# EAGLE board EATremelo1590A (EAGLE 6.6.0)
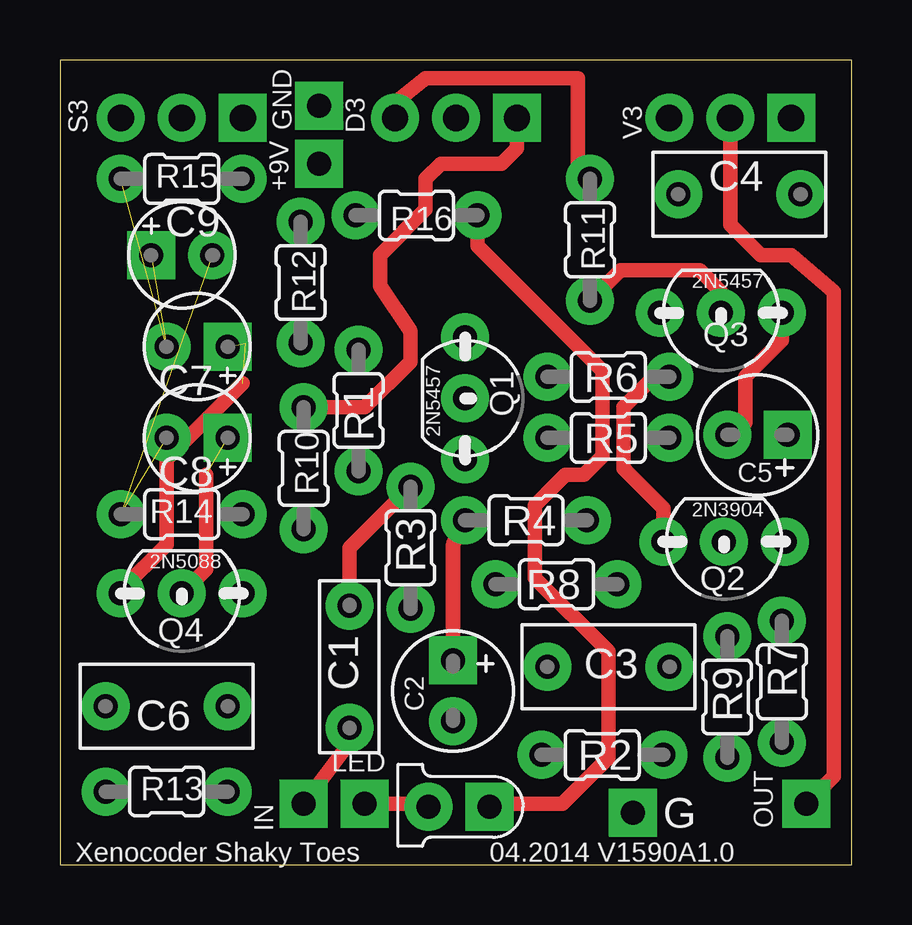
[diagram p0: board, top side]
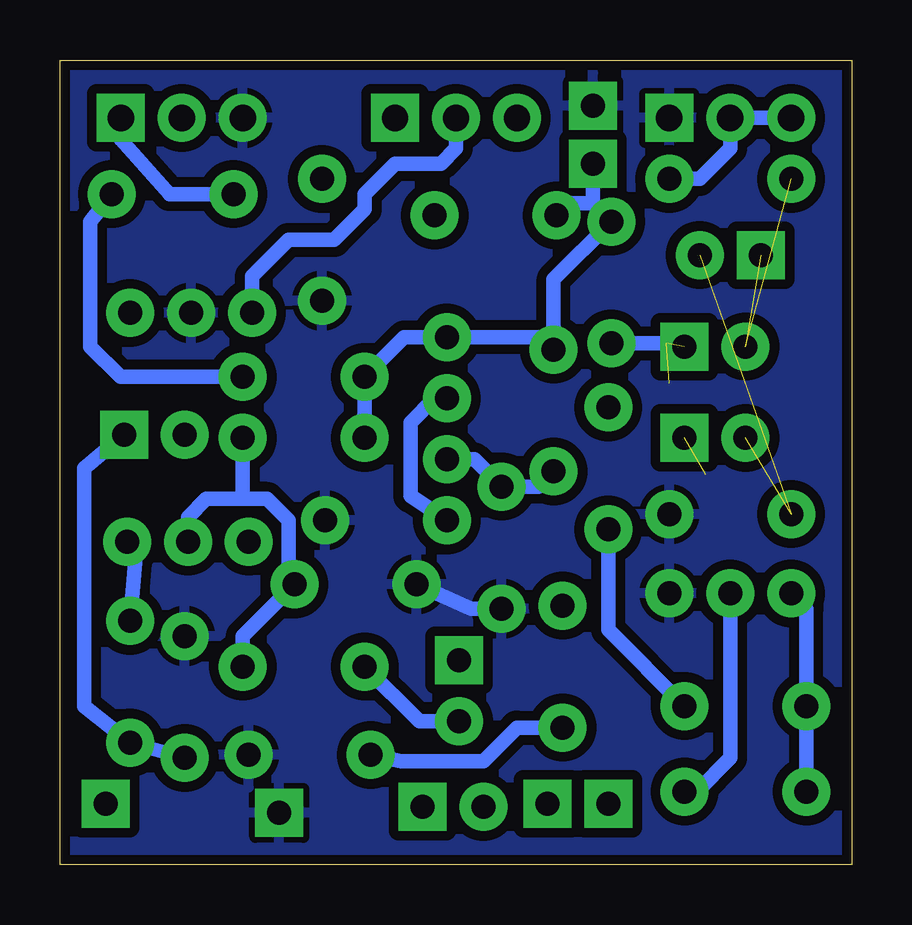
[diagram p1: board, bottom side, seen from below]

Size 33.02 x 33.53 mm. Coordinates in mm from the lower left corner, seen from the top.
Outline: 0,0 33.02,0 33.02,33.53 0,33.53 0,0
Copper layers (1*16): Top 0.0356mm / dielectric 1.5011mm / Bottom 0.0356mm
Design rules "LaenPCBOrder": minimum track width 6mil, minimum drill 13mil, track to track 6mil, track to pad 6mil, pad to pad 6mil, via to via 6mil, smd to smd 6mil, copper to edge 15mil, drill to drill 6mil, minimum pad ring 7mil, minimum via ring 7mil, stop-mask expansion 3mil, vias tented up to drill 0mil, thermal gap 10mil

## Footprints (pad centres in the part's own frame; a part is rotated, then mirrored left to right if it is on the bottom)
SQUARE = drill 1 pad 2 square: 1 0,0
072X025 = drill 1 pad 2: 1 -2.54,0; 2 2.54,0
050_020_1 = drill 1 pad 2 square: + -1.27,0 | drill 1 pad 2: - 1.27,0
072X035 = drill 1 pad 2: 1 -2.54,0; 2 2.54,0
044A = drill 1 pad 2 square: 1 -1.27,0 | drill 1 pad 2: 2 1.27,0
LED3MM = drill 1 pad 2 square: A -1.27,0 | drill 1 pad 2: K 1.27,0
TO92- = drill 1 pad 2: 1 2.54,0; 2 0,0; 3 -2.54,0
R0204/2 = drill 1 pad 2: 1 -2.54,0; 2 2.54,0
POT_9MM_HOLES = drill 1.1 pad 2: P$1 2.54,0; P$2 0,0 | drill 1.1 pad 2 square: P$3 -2.54,0

## Placement (x,y rotation side)
+9V  +9V(T)  [SQUARE]  10.79,29.21 0 top
C1  0.047uF  [072X025]  12.06,8.26 90 top
C2  10uF  [050_020_1]  16.38,7.24 270 top
C3  0.22uF  [072X035]  22.86,8.26 0 top
C4  0.47uF  [072X035]  28.32,27.94 180 top
C5  22uF  [050_020_1]  29.08,17.91 180 top
C6  0.47uF  [072X035]  4.45,6.6 180 top
C7  1uF  [044A]  5.71,21.59 180 top
C8  1uF  [044A]  5.71,17.78 180 top
C9  1uF  [044A]  5.08,25.4 0 top
D1  LED3MM  [LED3MM]  16.64,2.41 180 top
G  GND(T)  [SQUARE]  23.88,2.16 0 top
GND  GND(T)  [SQUARE]  10.79,31.62 0 top
IN  IN(T)  [SQUARE]  10.16,2.54 0 top
LED  3mm  [SQUARE]  12.7,2.54 0 top
OUT  OUT(T)  [SQUARE]  31.11,2.54 0 top
Q1  2N5457  [TO92-]  16.89,19.43 270 top
Q2  2N3904  [TO92-]  27.69,13.46 180 top
Q3  2N5457  [TO92-]  27.56,22.99 180 top
Q4  2N5088  [TO92-]  5.08,11.3 180 top
R1  1M  [R0204/2]  12.45,18.92 90 top
R2  1M  [R0204/2]  22.61,4.57 180 top
R3  1M  [R0204/2]  14.61,13.21 90 top
R4  10k  [R0204/2]  19.43,14.35 180 top
R5  560K  [R0204/2]  22.86,17.78 180 top
R6  4k7  [R0204/2]  22.86,20.32 180 top
R7  180  [R0204/2]  30.1,7.62 90 top
R8  150k  [R0204/2]  20.7,11.68 0 top
R9  1k2  [R0204/2]  27.81,6.99 270 top
R10  120k  [R0204/2]  10.16,16.51 270 top
R11  68k  [R0204/2]  22.1,26.04 90 top
R12  15k  [R0204/2]  10.03,24.26 90 top
R13  2M2  [R0204/2]  4.45,3.05 180 top
R14  15k  [R0204/2]  5.08,14.61 180 top
R15  1k  [R0204/2]  5.08,28.57 180 top
R16  4k7  [R0204/2]  14.86,27.05 180 top
SPEED  C100K  [POT_9MM_HOLES]  5.08,31.11 180 top
VALUE  DEPTH  [POT_9MM_HOLES]  16.51,31.11 180 top
VOLUME  A25K  [POT_9MM_HOLES]  27.94,31.11 180 top

## Library data of the parts
+9V G GND IN LED OUT = mb_supply
C1 C3 C4 C6 = mb_caps-box
C2 C5 = mb_caps-electro
C7-C9 = mb_caps-tant
D1 = mb_diodes
Q1-Q4 = mb_trans
R1-R16 = mb_resistors
SPEED VALUE VOLUME = mb_9mm Pot

## Nets
+9V: +9V.1 Q1.3 R1.2 R5.2 R6.2 R12.2 R16.2
GND: G.1 GND.1 Q3.2 Q4.3 R2.1 R3.1 R4.1 R8.1 R9.1 R11.1 R14.1 SPEED.P$3 VOLUME.P$1
IN: C1.1 IN.1 R2.2
N$1: C5.+ R7.1 R9.2
N$2: C1.2 Q1.1 R1.1 R3.2
N$3: D1.A R16.1
N$4: C2.+ Q1.2 R4.2
N$5: C4.1 Q2.1 R6.1
N$6: C2.- C3.1
N$7: C3.2 Q2.2 R5.1 R8.2
N$8: Q2.3 R7.2
N$9: C5.- Q3.3
N$10: C4.2 VOLUME.P$3
N$11: Q3.1 VALUE.P$2
N$12: R10.1 VALUE.P$3
N$13: R11.2 VALUE.P$1
N$14: C6.1 R10.2
N$15: C6.2 C7.1 Q4.1 R12.1 R13.2
N$16: C8.1 Q4.2 R13.1
N$17: C7.2 C9.1 R15.2
N$18: C8.2 C9.2 R14.2
N$19: R15.1 SPEED.P$1 SPEED.P$2
N$20: D1.K LED.1
OUT: OUT.1 VOLUME.P$2

## Tracks (layer width: path | path; a pad name or v marks a point on that pad's centre or on a via)
+9V
  Bottom 0.61: R5.2 R6.2 18.67,21.97 Q1.3 12.95,21.97 R1.2 12.45,24.38 R12.2 10.79,27.56 | 10.79,27.56 +9V.1 | R16.2 11.81,27.56 10.79,27.56
GND
  Top 0.61: Q3.2 27.56,23.88 26.67,24.77 23.37,24.77 R11.1
  Bottom 0.61: R8.1 15.88,10.67 R3.1
  pour Bottom (isolate 0.406): 0,33.27 33.02,33.27 33.02,0 0,0
IN
  Top 0.61: IN.1 12.06,5.08 C1.1
  Bottom 0.61: C1.1 13.97,5.71 15.37,4.32 18.8,4.32 R2.2
N$1
  Bottom 0.61: R9.2 R7.1 32,6.6 32,16.51 C5.+
N$2
  Top 0.61: C1.2 12.06,13.21 R3.2
  Bottom 0.61: Q1.1 15.75,16.89 R3.2 13.08,15.75 R1.1
N$3
  Top 0.61: R16.1 17.4,25.78 22.61,20.57 22.61,17.02 21.84,16.26 21.08,16.26 19.81,14.99 19.81,11.94 22.86,8.89 22.86,4.45 20.95,2.54 18.03,2.54 D1.A
N$4
  Top 0.61: C2.+ 16.38,13.34 R4.2
  Bottom 0.61: R4.2 18.41,15.37 18.41,18.41 17.4,19.43 Q1.2
N$5
  Top 0.61: Q2.1 25.15,14.86 23.5,16.51 23.5,19.05 24.77,20.32 R6.1
  Bottom 0.61: R6.1 30.48,20.32 31.75,21.59 31.75,26.8 C4.1
N$6
  Bottom 0.61: C2.- 18.03,5.97 C3.1
N$7
  Bottom 0.61: 25.4,15.24 24.38,15.24 23.5,14.35 23.5,11.43 | 25.4,15.24 26.92,15.24 27.69,14.48 Q2.2 | R5.1 25.4,15.24 | 23.37,11.81 R8.2 23.5,11.43 | C3.2 25.4,9.53 23.5,11.43
N$8
  Bottom 0.61: R7.2 29.84,13.08 Q2.3
N$9
  Top 0.61: C5.- 28.57,18.41 28.57,20.32 30.1,21.84 Q3.3
N$10
  Bottom 0.61: 25.4,28.07 C4.2 28.45,27.94 30.48,30.23 VOLUME.P$3
N$11
  Bottom 0.61: Q3.1 25.02,24.51 23.5,26.04 21.59,26.04 20.32,27.3 20.32,27.94 19.05,29.21 17.14,29.21 16.51,29.84 VALUE.P$2
N$12
  Top 0.61: R10.1 12.7,19.05 14.61,20.95 14.61,22.23 13.34,24.13 13.34,25.4 15.24,27.3 15.24,28.57 15.88,29.21 18.41,29.21 19.05,29.84 VALUE.P$3
N$13
  Top 0.61: R11.2 21.59,29.08 21.59,32.77 15.24,32.77 13.97,31.75 VALUE.P$1
N$14
  Bottom 0.61: C6.1 10.16,9.78 R10.2
N$15  (2 unrouted)
  Top 0.61: Q4.1 2.54,11.43 4.45,13.34 4.45,16.89 7.62,20.07
  Bottom 0.61: R12.1 7.75,21.72 | R13.2 C6.2 1.91,10.67 Q4.1
N$16  (1 unrouted)
  Top 0.61: Q4.2 6.1,12.32 6.1,16.26
  Bottom 0.61: R13.1 6.48,3.05 5.08,4.45 Q4.2
N$17  (2 unrouted)
N$18  (2 unrouted)
N$19
  Bottom 0.61: R15.1 6.35,28.57 5.08,29.84 SPEED.P$2 SPEED.P$1
N$20
  Top 0.61: LED.1 15.24,2.54 D1.K
OUT
  Top 0.61: VOLUME.P$2 27.94,26.67 29.21,25.4 30.48,25.4 32.26,23.88 32.26,3.68 OUT.1

## Text on the board
tNames: S3 | D3 | V3 | Xenocoder Shaky Toes | 04.2014 V1590A1.0